# Altium PCB FPC_Tran.PcbDoc
Units mm, origin at the board's own origin, x right, y up, seen from the top; angles counter-clockwise.
Board outline 48.28 x 35.4 mm, 2 copper layers (Top Layer, Bottom Layer); 3 components, 35 nets, 150 pads, 91 vias.
Unrouted connection lines stored in the file: 2.
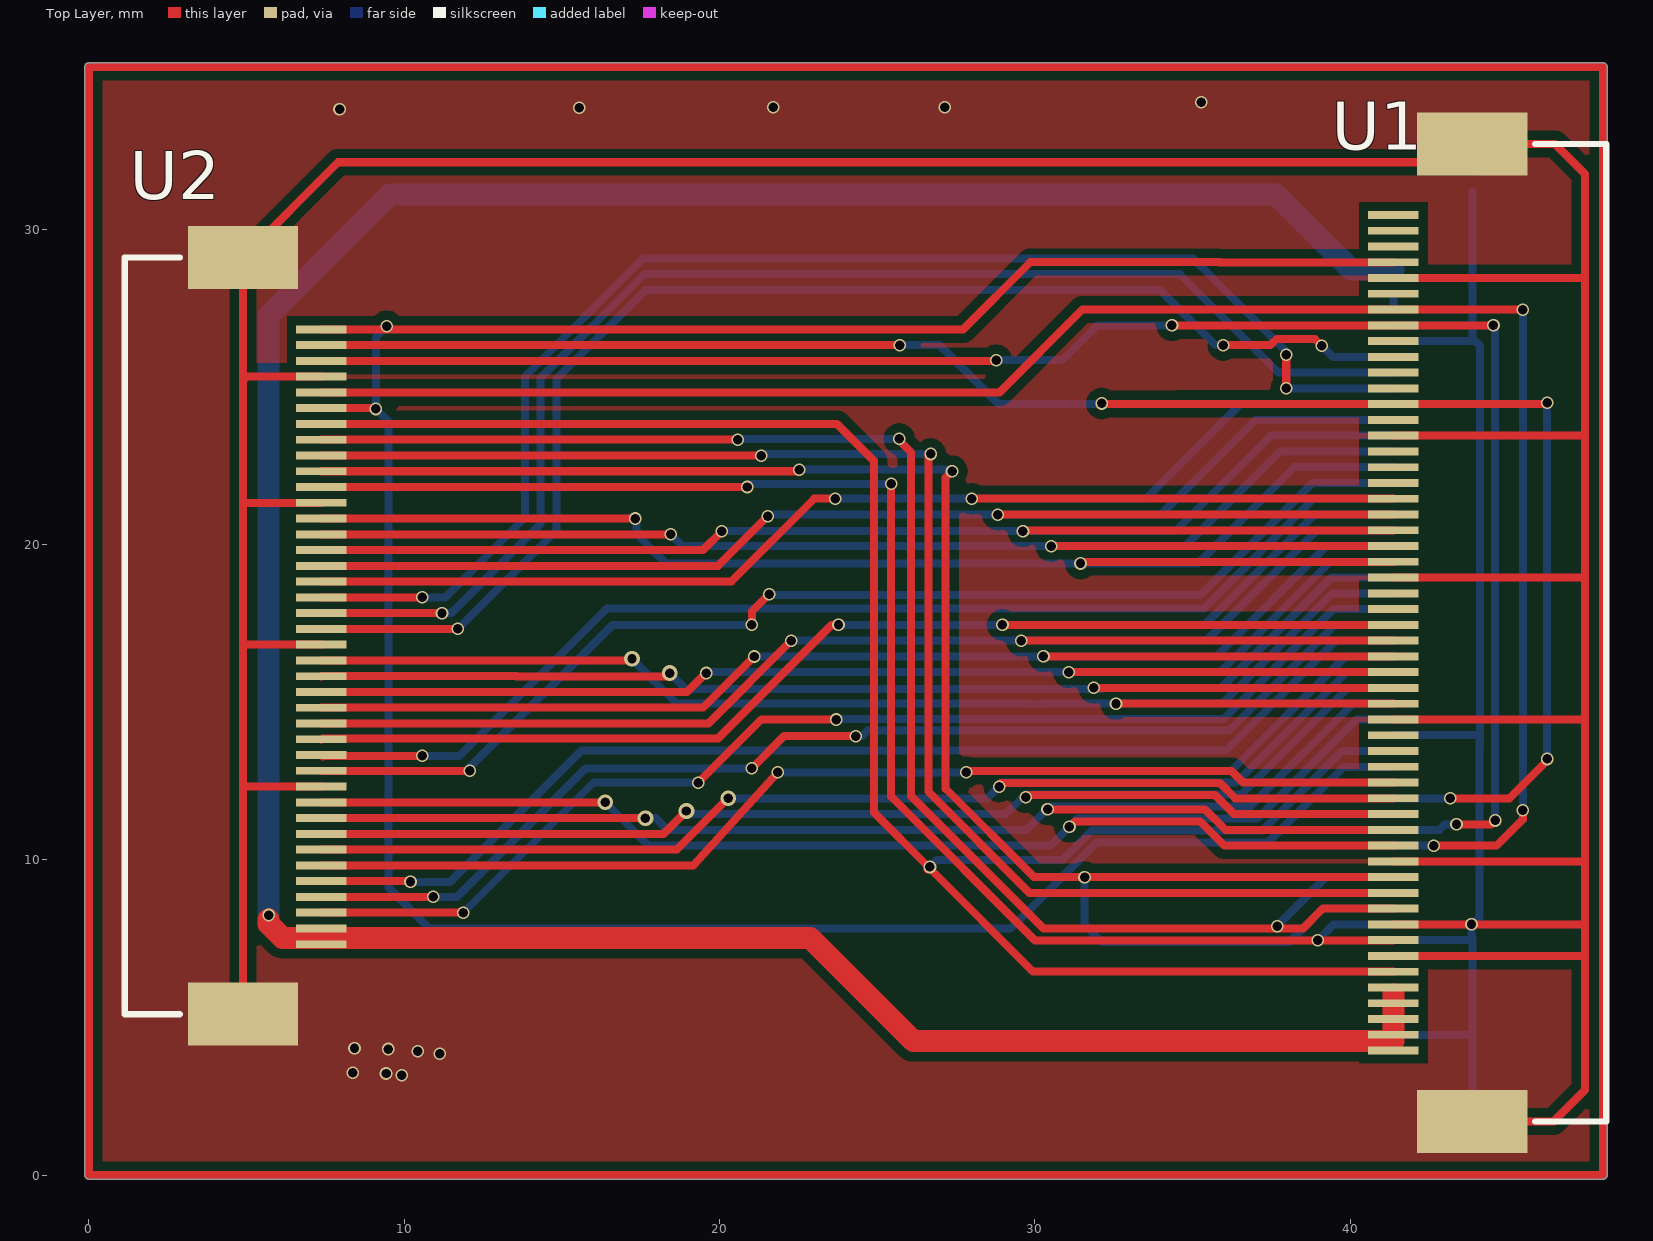
[diagram p0: Top Layer view]
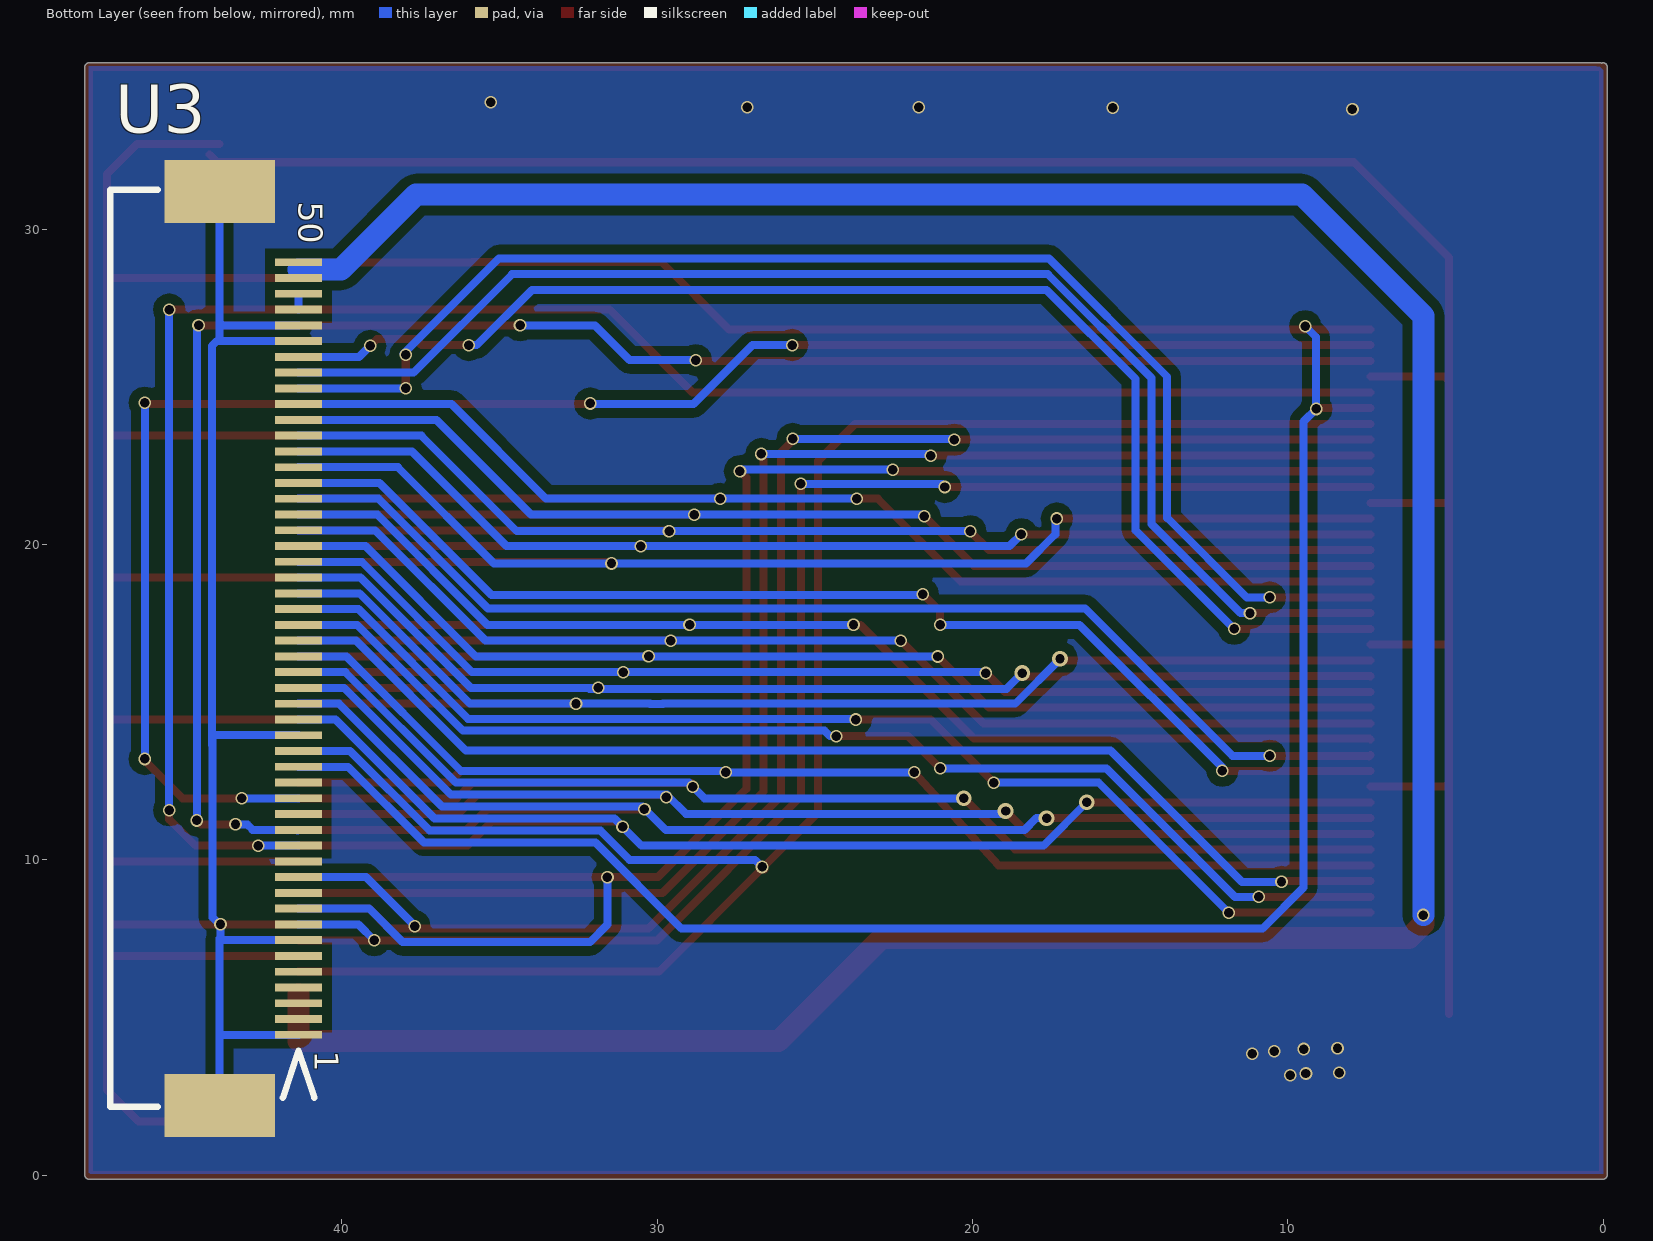
[diagram p1: Bottom Layer view, seen from below]

## Layer stack, top to bottom
Top Solder: solder mask 0.0102, Solder Resist, Dk 3.5
Top Layer: signal copper 0.0356
Dielectric 1: dielectric 0.32, FR-4, Dk 4.8
Bottom Layer: signal copper 0.0356
Bottom Solder: solder mask 0.0102, Solder Resist, Dk 3.5

## Board outline
-0.127,0 ccw(c0,0) 0,-0.127 48.025,-0.127 ccw(c48.025,0) 48.152,0 48.152,35.15 ccw(c48.025,35.15) 48.025,35.277 0.1,35.277 ccw(c0.1,35.15) 0.05,35.267 ccw(c0,35.15) -0.127,35.15

## Design rules (kind name [scope] priority, off if disabled: settings)
Clearance Clearance_Polygons [InPolygon] p1: gap=0.3 ignorepadtopadclearanceinfootprint=FALSE
Clearance "Innerlayer Track Via Clearance" [IsTrack and OnMid vs IsVia] p2: gap=0.127 ignorepadtopadclearanceinfootprint=FALSE
Clearance "Via-Via Clearance" [IsVia vs IsVia] p3: gap=0.3 ignorepadtopadclearanceinfootprint=FALSE
Clearance "Pad-Pad Clearance" [IsPad vs IsPad] p4: gap=0.25 ignorepadtopadclearanceinfootprint=TRUE
Clearance "via-pad Clearance" [IsVia vs IsPad] p5: gap=0.15 ignorepadtopadclearanceinfootprint=FALSE
Clearance "General Clearance" [All] p6: gap=0.125 ignorepadtopadclearanceinfootprint=FALSE
PlaneConnect [All] p1: planeconnectstyle=Direct reliefexpansion=0.508 reliefentries=4 reliefconductorwidth=0.254 reliefairgap=0.254
PolygonConnect [All] p1: connectstyle=Direct reliefconductorwidth=0.254 reliefentries=4 polygonreliefangle="90 Angle" airgapwidth=0.254
RoutingVias [All] p1: holewidth=0.3 width=0.4 viastyle="Through Hole" minholewidth=0.2 minwidth=0.3 maxholewidth=0.711 maxwidth=1.27
SolderMaskExpansion [All] p1: expansion=0.102
Width Width_Power [(InNet('3.3V') AND InNet('5V') AND InNet('+5') AND InNet('GND'))] p1: maxlimit=1 minlimit=0.2 preferedwidth=0.4
Width [All] p2: maxlimit=1 minlimit=0.1 preferedwidth=0.2
29 further rules are at their usual default settings.

## Classes and differential pairs
component class FPC_Tran: U2

## Components (designator, comment, footprint, x,y, rotation, side; value= is the part's Value field where it differs from the comment)
U1 "FL_LCD_FPC_54P" FPC_0.5MM_54P 41.375,16.953 r270 top
U2 "YZ_LCD_FPC_40P" FPC_0.5mm_40P 7.386,17.105 r90 top
U3 "MY_LCD_FPC_50P" FPC_0.5MM_50P 41.375,4.453 r90 bottom

## Footprints (in the part's own frame and the unit in brackets; to place one, negate y for a bottom-side part, rotate by r counter-clockwise, add the part's x,y. Pads: shape width x height; smd on the part's side, far side on the other; paste and mask are expansions set on the pad)
FPC_0.5mm_40P [mm] "FPC_0.5mm_40P"
  rect 0.25x1.6 smd: 1(-9.78,0.011) 2(-9.28,0.011) 3(-8.78,0.011) 4(-8.28,0.011) 5(-7.78,0.011) 6(-7.28,0.011) 7(-6.78,0.011) 8(-6.28,0.011) 9(-5.78,0.011) 10(-5.28,0.011) 11(-4.78,0.011) 12(-4.28,0.011) 13(-3.78,0.011) 14(-3.28,0.011) 15(-2.78,0.011) 16(-2.28,0.011) 17(-1.78,0.011) 18(-1.28,0.011) 19(-0.78,0.011) 20(-0.28,0.011) 21(0.22,0.011) 22(0.72,0.011) 23(1.22,0.011) 24(1.72,0.011) 25(2.22,0.011) 26(2.72,0.011) 27(3.22,0.011) 28(3.72,0.011) 29(4.22,0.011) 30(4.72,0.011) 31(5.22,0.011) 32(5.72,0.011) 33(6.22,0.011) 34(6.72,0.011) 35(7.22,0.011) 36(7.72,0.011) 37(8.22,0.011) 38(8.72,0.011) 39(9.22,0.011) 40(9.72,0.011)
  rect 2x3.5 smd: A(-12,2.5) B(12,2.5)
  silkscreen extent -12,4.5 12,6.25
FPC_0.5MM_50P [mm]
  rect 0.25x1.5 smd: 1(0,0) 2(0.5,0) 3(1,0) 4(1.5,0) 5(2,0) 6(2.5,0) 7(3,0) 8(3.5,0) 9(4,0) 10(4.5,0) 11(5,0) 12(5.5,0) 13(6,0) 14(6.5,0) 15(7,0) 16(7.5,0) 17(8,0) 18(8.5,0) 19(9,0) 20(9.5,0) 21(10,0) 22(10.5,0) 23(11,0) 24(11.5,0) 25(12,0) 26(12.5,0) 27(13,0) 28(13.5,0) 29(14,0) 30(14.5,0) 31(15,0) 32(15.5,0) 33(16,0) 34(16.5,0) 35(17,0) 36(17.5,0) 37(18,0) 38(18.5,0) 39(19,0) 40(19.5,0) 41(20,0) 42(20.5,0) 43(21,0) 44(21.5,0) 45(22,0) 46(22.5,0) 47(23,0) 48(23.5,0) 49(24,0) 50(24.5,0)
  rect 2x3.5 smd: A(-2.25,2.5) B(26.75,2.5)
  silkscreen extent -2.29,-0.5 26.8,5.97
FPC_0.5MM_54P [mm]
  rect 0.25x1.6 smd: 1(-13.5,0) 2(-13,0) 3(-12.5,0) 4(-12,0) 5(-11.5,0) 6(-11,0) 7(-10.5,0) 8(-10,0) 9(-9.5,0) 10(-9,0) 11(-8.5,0) 12(-8,0) 13(-7.5,0) 14(-7,0) 15(-6.5,0) 16(-6,0) 17(-5.5,0) 18(-5,0) 19(-4.5,0) 20(-4,0) 21(-3.5,0) 22(-3,0) 23(-2.5,0) 24(-2,0) 25(-1.5,0) 26(-1,0) 27(-0.5,0) 28(0,0) 29(0.5,0) 30(1,0) 31(1.5,0) 32(2,0) 33(2.5,0) 34(3,0) 35(3.5,0) 36(4,0) 37(4.5,0) 38(5,0) 39(5.5,0) 40(6,0) 41(6.5,0) 42(7,0) 43(7.5,0) 44(8,0) 45(8.5,0) 46(9,0) 47(9.5,0) 48(10,0) 49(10.5,0) 50(11,0) 51(11.5,0) 52(12,0) 53(12.5,0) 54(13,0)
  rect 2x3.5 smd: A(-15.75,2.5) B(15.25,2.5)
  silkscreen extent -15.75,4.5 15.25,6.75

## Via types
v1: diameter 0.4, hole 0.3, Top Layer to Bottom Layer, 85 vias
v2: diameter 0.5, hole 0.3, Top Layer to Bottom Layer, 6 vias

## Nets (pads, with @x,y where several pads share a name; then routed paths per layer and width w, separated by ;. In a path a pad name is that pad's centre, name@x,y a point inside that pad or via, vN(x,y) a via of type N, cw(c..) or ccw(c..) an arc to the next point about the centre after c; other vN are vias at no path point)
+5: U1.50 U1.51 U1.52 U1.53 U1.54 U2.1 U2.2 U3.49 U3.50 | length 96.3
  Top Layer w0.7: v1@5.7,8.1 5.7,7.975 6.15,7.525 22.875,7.525 26.15,4.25 41.375,4.25 U1.53 U1.52 U1.51 41.375,5.725
  Bottom Layer w0.254: U3.49 41.375,28.725
  Bottom Layer w0.7: v1(5.7,8.25) 5.7,27.25 9.55,31.1 37.65,31.1 40.025,28.725 41.375,28.725
CT_INT: U1.13 U2.39 U3.16 | length 56.4
  Top Layer w0.254: U2.39 7.377,26.327 v1(25.723,26.327) v1@25.725,26.325 ; v1(32.125,24.475) 32.147,24.453 34.45,24.453 U1.13 46.203,24.453 v1(46.25,24.5) ; v1(43.175,11.953) 45.053,11.953 46.25,13.15 v1(46.25,13.2)
  Bottom Layer w0.254: v1(25.723,26.327) 26.973,26.327 28.847,24.453 32.103,24.453 v1(32.125,24.475) ; U3.16 v1(43.175,11.953) v1@43.178,11.953 ; v1(46.25,13.2) v1(46.25,24.5)
CT_RST: U1.4 U2.35 U2.40 U3.18 | length 89.3
  Top Layer w0.254: U2.35 9.075,24.325 v1(9.1,24.3) ; U2.40 27.725,26.825 29.856,28.956 35.872,28.956 35.875,28.953 U1.4
  Bottom Layer w0.254: v1(9.45,26.925) 9.1,26.575 v1(9.1,24.3) 9.5,23.9 9.5,9.121 10.796,7.825 29.236,7.825 31.961,10.55 37.4,10.55 39.803,12.953 U3.18
CT_SCL: U1.8 U2.38 U3.14 | length 56.8
  Top Layer w0.254: U2.38 28.75,25.825 v1(28.775,25.85) ; v1@34.35,26.953 U1.8 v1(44.547,26.953) ; v1(43.375,11.125) 44.475,11.125 v1(44.6,11.25)
  Bottom Layer w0.254: v1(28.775,25.85) 30.875,25.85 31.975,26.95 v1(34.35,26.95) ; U3.14@41.403,10.925 U3.14 42.828,10.953 43,11.125 v1(43.375,11.125) v1@43.326,11.076 ; v1(44.547,26.953) 44.6,26.9 v1(44.6,11.25)
CT_SDA: U1.7 U2.36 U3.13 | length 59.8
  Top Layer w0.254: U2.36 28.878,24.825 31.506,27.453 U1.7 v1(45.478,27.453) ; v1(42.647,10.453) 44.649,10.453 45.478,11.282 v1(45.478,11.575)
  Bottom Layer w0.254: U3.13 v1(42.647,10.453) v1@42.63,10.436 ; v1(45.478,11.575) v1(45.478,27.453)
GND: U1.5 U1.15 U1.24 U1.33 U1.42 U1.46 U1.48 U1.A U1.B U2.11 U2.20 U2.29 U2.37 U2.A U2.B U3.1 U3.7 U3.12 U3.20 U3.45 U3.46 U3.A U3.B | length 196.7
  Top Layer w0.254: U2.A 4.886,12.425 ; U2.11 4.986,12.325 4.886,12.425 ; U2.20 4.961,16.825 4.886,16.9 ; U2.29 4.886,21.325 ; U2.37 5.011,25.325 4.886,25.2 ; U1.48 47.378,6.953 47.45,7.025 ; U1.46 v1(43.85,7.953) 47.447,7.953 47.45,7.95 ; U1.42 47.45,9.953 ; U1.33 47.447,14.453 47.45,14.45 ; U1.24 47.403,18.953 47.45,19 ; U1.15 47.372,23.453 47.45,23.375 ; U1.5 47.397,28.453 47.45,28.4 ; U1.B 46.447,1.703 47.45,2.706 47.45,7.025 ; U1.A 46.497,32.703 47.45,31.75 47.45,28.4 ; U1.A@44.201,32.376 43.95,32.125 7.906,32.125 U2.B 4.886,25.2 ; 4.886,12.425 4.886,16.9 ; 4.886,16.9 4.886,21.325 ; 4.886,21.325 4.886,25.2 ; 47.45,7.025 47.45,7.95 ; 47.45,7.95 47.45,9.953 ; 47.45,9.953 47.45,14.45 ; 47.45,14.45 47.45,19 ; 47.45,19 47.45,23.375 ; 47.45,23.375 47.45,28.4
  Bottom Layer w0.254: U3.1 43.872,4.453 43.875,4.45 ; U3.7 43.828,7.453 43.85,7.475 ; U3.20 44.1,13.953 44.1,13.675 ; U3.45 43.967,26.453 44.125,26.295 44.125,13.65 44.1,13.675 ; U3.46 43.778,26.953 43.875,27.05 ; v1(43.85,7.953) 43.85,7.475 ; U3.A 43.875,4.45 ; v1@43.875,7.953 44.1,8.178 44.1,13.675 ; 43.875,26.5 43.875,27.05 ; U3.B 43.875,27.05 ; 43.85,7.475 43.875,7.5 43.875,4.45
  other v1: 9.921,3.175 9.425,3.225 8.375,3.25 11.125,3.85 10.425,3.925 9.5,4 8.425,4.025 7.95,33.8 15.55,33.85 21.7,33.875 27.14,33.875 35.275,34.025
LCD_B0: U2.21 U3.44 | length 42.3
  Top Layer w0.254: U2.21 v1(11.7,17.325) ; v1(35.975,26.325) 37.475,26.325 37.675,26.525 38.881,26.525 v1(39.106,26.3)
  Bottom Layer w0.254: v1(11.7,17.325) 14.825,20.45 14.825,25.25 17.65,28.075 33.975,28.075 35.725,26.325 v1(35.975,26.325) ; v1(39.106,26.3) 39.453,25.953 U3.44
LCD_B1: U2.22 U3.43 | length 42.5
  Top Layer w0.254: U2.22 v1(11.2,17.825)
  Bottom Layer w0.254: v1(11.2,17.825) 11.5,17.825 14.325,20.65 14.325,25.286 17.614,28.575 34.6,28.575 37.722,25.453 U3.43
LCD_B2: U2.23 U3.42 | length 43.6
  Top Layer w0.254: U2.23 v1(10.575,18.325) ; v1(37.975,24.956) v1(37.975,26.022) v1@37.997,26
  Bottom Layer w0.254: v1(10.575,18.325) 11.3,18.325 13.825,20.85 13.825,25.322 17.578,29.075 35.025,29.075 38.048,26.052 38.019,26.022 v1(37.975,26.022) ; v1(37.975,24.956) 37.972,24.953 U3.42
LCD_B3: U1.19 U2.24 U3.41 | length 49.7
  Top Layer w0.254: U2.24 7.377,18.827 11.537,18.827 11.539,18.825 20.375,18.825 23.003,21.453 v1(23.675,21.453) ; v1@28,21.45 v1(28.003,21.453) U1.19
  Bottom Layer w0.254: v1(23.675,21.453) v1(28.003,21.453) 33.528,21.453 36.528,24.453 U3.41
LCD_B4: U1.20 U2.25 U3.40 | length 48.4
  Top Layer w0.254: U2.25 19.95,19.325 v1(21.525,20.9) ; v1(28.825,20.95) 28.828,20.953 U1.20
  Bottom Layer w0.254: v1@21.525,20.95 v1(28.825,20.95) 34,20.95 37.003,23.953 U3.40
LCD_B5: U1.21 U2.26 U3.39 | length 47.3
  Top Layer w0.254: U2.26 19.475,19.825 v1(20.075,20.425) v1@20.1,20.425 ; v1(29.625,20.425) 29.653,20.453 U1.21
  Bottom Layer w0.254: v1(20.075,20.425) v1(29.625,20.425) 34.453,20.425 37.481,23.453 U3.39
LCD_B6: U1.22 U2.27 U3.38 | length 46.3
  Top Layer w0.254: U2.27 11.375,20.325 11.377,20.323 12.583,20.323 12.585,20.325 17.136,20.325 17.138,20.323 18.448,20.323 v1(18.45,20.325) ; v1(30.525,19.95) 30.528,19.953 U1.22
  Bottom Layer w0.254: v1(18.45,20.325) 18.825,19.95 v1(30.525,19.95) 34.775,19.95 37.778,22.953 U3.38
LCD_B7: U1.23 U2.28 U3.37 | length 45.9
  Top Layer w0.254: U2.28 v1(17.325,20.825) ; v1@31.55,19.453 U1.23
  Bottom Layer w0.254: v1@17.375,20.825 17.375,20.325 18.3,19.4 v1(31.45,19.4) 35.175,19.4 38.228,22.453 U3.37
LCD_CLK: U1.47 U2.30 U3.8 | length 48.5
  Top Layer w0.254: U2.30 v1(20.875,21.825) ; v1(25.447,21.925) 25.447,12.009 30.01,7.446 41.368,7.446 U1.47
  Bottom Layer w0.254: v1(20.875,21.825) 20.975,21.925 v1(25.447,21.925) ; v1(38.975,7.45) 39.478,7.953 U3.8
LCD_DE: U1.45 U2.33 U3.11 | length 51.4
  Top Layer w0.254: U2.33 v1(20.575,23.325) ; v1@25.675,23.325 26.075,22.925 26.075,12.025 30.275,7.825 38.506,7.825 39.134,8.453 U1.45
  Bottom Layer w0.254: v1(20.575,23.325) 20.6,23.35 v1(25.7,23.35) ; v1(37.686,7.9) 39.239,9.453 U3.11
LCD_G0: U2.12 U3.36 | length 38.1
  Top Layer w0.254: U2.12 7.377,12.823 12.073,12.823 v1(12.075,12.825) ; v1(21.025,17.453) 21.025,17.875 v1(21.575,18.425)
  Bottom Layer w0.254: v1(12.075,12.825) 12.075,12.925 16.603,17.453 v1(21.025,17.453) ; v1@21.575,18.4 35.253,18.4 38.806,21.953 U3.36
LCD_G1: U2.13 U3.35 | length 37.4
  Top Layer w0.254: U2.13 U2.13@7.425,13.275 ; U2.13@7.45,13.3 v1(10.575,13.3)
  Bottom Layer w0.254: v1(10.575,13.3) 11.75,13.3 16.425,17.975 21.386,17.975 21.388,17.973 35.362,17.973 38.842,21.453 U3.35
LCD_G2: U1.27 U2.14 U3.34 | length 49.4
  Top Layer w0.254: U2.14 7.402,13.852 19.949,13.852 23.55,17.453 v1(23.775,17.453) ; v1(28.975,17.453) U1.27
  Bottom Layer w0.254: v1(23.775,17.453) v1(28.975,17.453) 35.378,17.453 38.878,20.953 U3.34
LCD_G3: U1.28 U2.15 U3.33 | length 48.3
  Top Layer w0.254: U2.15 19.647,14.325 v1(22.275,16.953) ; v1(29.575,16.953) U1.28
  Bottom Layer w0.254: v1@22.275,16.953 v1(29.575,16.953) 35.45,16.953 38.95,20.453 U3.33
LCD_G4: U1.29 U2.16 U3.32 | length 47.2
  Top Layer w0.254: U2.16 19.475,14.825 v1(21.1,16.45) v1@21.103,16.453 ; v1(30.275,16.453) U1.29
  Bottom Layer w0.254: v1(21.1,16.45) 30.272,16.45 v1(30.275,16.453) 35.753,16.453 39.253,19.953 U3.32
LCD_G5: U1.30 U2.17 U3.31 | length 46
  Top Layer w0.254: U2.17 7.379,15.321 18.971,15.321 v1(19.575,15.925) ; v1@31.075,15.955 31.077,15.953 U1.30
  Bottom Layer w0.254: v1(19.575,15.925) 19.603,15.953 v1(31.075,15.953) 35.87,15.953 39.37,19.453 U3.31
LCD_G6: U1.31 U2.18 U3.30 | length 45.5
  Top Layer w0.254: U2.18 7.377,15.823 7.379,15.825 13.565,15.825 13.567,15.823 18.323,15.823 v2(18.425,15.925) ; v1(31.875,15.455) 41.373,15.455 U1.31
  Bottom Layer w0.254: v2(18.425,15.925) 18.925,15.425 32.148,15.425 ; v1(31.875,15.455) 35.908,15.455 39.406,18.953 U3.30
LCD_G7: U1.32 U2.19 U3.29 | length 44.9
  Top Layer w0.254: U2.19 17.175,16.325 v2(17.225,16.375) ; v1(32.575,14.953) U1.32
  Bottom Layer w0.254: v2(17.225,16.375) 18.647,14.953 29.816,14.953 29.818,14.951 30.234,14.951 30.236,14.953 v1(32.575,14.953) 35.942,14.953 39.442,18.453 U3.29
LCD_HSYNC: U1.43 U2.31 U3.9 | length 57.5
  Top Layer w0.254: U2.31 22.475,22.325 v1(22.527,22.377) ; v1(27.375,22.325) 27.175,22.125 27.175,12.253 29.975,9.453 v1(31.578,9.453) 31.822,9.453 ; 31.825,9.45 31.822,9.453 ; U1.43 31.822,9.453
  Bottom Layer w0.254: v1(22.527,22.377) v1@27.323,22.377 ; v1(31.578,9.453) 31.578,7.947 32.125,7.4 38.081,7.4 39.134,8.453 U3.9
LCD_PWM: U1.49 U2.34 U3.19 | length 64.1
  Top Layer w0.254: U2.34 23.725,23.825 24.896,22.654 24.896,11.504 v1@26.65,9.75 ; v1@26.6,9.7 v1@26.65,9.75 ; v1(26.675,9.775) v1@26.65,9.75 ; U1.49 29.947,6.453 v1@26.65,9.75
  Bottom Layer w0.254: v1(26.675,9.775) 26.901,10.001 30.876,10.001 31.805,10.93 37.216,10.93 39.739,13.453 U3.19
LCD_R0: U2.3 U3.28 | length 38
  Top Layer w0.254: U2.3 v1(11.875,8.325) ; v1(19.323,12.448) 21.325,14.45 v1(23.7,14.45)
  Bottom Layer w0.254: v1(11.875,8.325) 15.998,12.448 v1(19.323,12.448) ; v1(23.7,14.45) 23.725,14.475 36,14.475 39.478,17.953 U3.28
LCD_R1: U2.4 U3.27 | length 37.7
  Top Layer w0.254: U2.4 v1(10.925,8.825) ; v1(21.025,12.9) 22.05,13.925 v1(24.325,13.925)
  Bottom Layer w0.254: v1(10.925,8.825) 11.675,8.825 15.75,12.9 v1(21.025,12.9) ; v1(24.325,13.925) 24.525,13.925 24.696,14.096 36.157,14.096 39.514,17.453 U3.27 U3.27@41.477,17.453
LCD_R2: U2.5 U3.26 | length 37.2
  Top Layer w0.254: U2.5 10.175,9.325 v1(10.2,9.3)
  Bottom Layer w0.254: v1(10.2,9.3) 11.45,9.3 15.623,13.473 36.07,13.473 39.55,16.953 U3.26
LCD_R3: U1.37 U2.6 U3.25 | length 50.5
  Top Layer w0.254: U2.6 19.175,9.825 v1(21.853,12.778) ; v1(27.825,12.778) 27.861,12.814 36.239,12.814 36.6,12.453 U1.37
  Bottom Layer w0.254: v1(21.853,12.778) v1(27.825,12.778) 27.872,12.825 36.228,12.825 39.856,16.453 U3.25
LCD_R4: U1.38 U2.7 U3.24 | length 49
  Top Layer w0.254: U2.7 18.647,10.325 v2(20.275,11.953) ; v1@28.875,12.399 28.911,12.435 35.873,12.435 36.355,11.953 U1.38
  Bottom Layer w0.254: v2(20.275,11.953) 28.503,11.953 28.996,12.446 36.385,12.446 39.892,15.953 U3.24
  other v1: 28.875,12.325
LCD_R5: U1.39 U2.8 U3.23 | length 47.9
  Top Layer w0.254: U2.8 14.865,10.825 14.869,10.821 18.221,10.821 v2(18.95,11.55) ; v1@29.695,12.02 29.728,12.053 35.719,12.053 36.319,11.453 U1.39
  Bottom Layer w0.254: v2@18.95,11.451 29.079,11.451 29.081,11.453 29.695,12.067 36.542,12.067 39.928,15.453 U3.23
  other v1: 29.711,11.983
LCD_R6: U1.40 U2.9 U3.22 | length 47
  Top Layer w0.254: U2.9 11.675,11.325 11.677,11.323 12.108,11.323 12.11,11.325 15.025,11.325 ; 15.077,11.323 v2(17.65,11.323) ; v1(30.404,11.601) 35.399,11.601 36.047,10.953 U1.40
  Bottom Layer w0.254: v2(17.65,11.323) 17.977,11.323 18.349,10.951 29.729,10.951 30.379,11.601 v1(30.404,11.601) 30.404,11.626 30.466,11.688 36.827,11.688 40.092,14.953 U3.22
LCD_R7: U1.41 U2.10 U3.21 | length 46.9
  Top Layer w0.254: U2.10 v2(16.375,11.825) ; v1(31.1,11.05) 31.272,11.222 35.242,11.222 36.011,10.453 U1.41
  Bottom Layer w0.254: v2(16.375,11.825) 17.751,10.449 30.499,10.449 v1(31.1,11.05) 31.359,11.309 37.059,11.309 40.203,14.453 U3.21
LCD_VSYNC: U1.44 U2.32 U3.10 | length 46.1
  Top Layer w0.254: U2.32 v1@21.323,22.825 ; v1@26.623,22.801 26.623,12.167 29.837,8.953 U1.44
  Bottom Layer w0.254: v1(21.323,22.821) 21.375,22.873 v1(26.695,22.873)
pads on no net: U1.1 U1.2 U1.3 U1.6 U1.9 U1.10 U1.11 U1.12 U1.14 U1.16 U1.17 U1.18 U1.25 U1.26 U1.34 U1.35 U1.36 U3.2 U3.3 U3.4 U3.5 U3.6 U3.15 U3.17 U3.47 U3.48
copper on no net: | length 169.6
  Top Layer w0.254: 0.1,35.15 48.025,35.15 48.025,0 2.85,0 0,0 0,35.15 2.85,35.15
  Bottom Layer w0.254: 41.375,27.453 41.375,27.953

## Polygon pours and split planes (outlines as drawn)
GND on Bottom Layer "Bottom Layer-GND" (solid, remove dead copper, pour order 8): 0.1,35.15 0,35.05 0,0.05 47.975,0.05 48.025,0 48.025,35.175 0.025,35.175 0,35.15
GND on Top Layer "Top Layer-GND" (solid, remove dead copper, pour order 12): 0,35.15 0,0 48.025,0 48.025,35.15 0,35.15
GND on Top Layer "Top Layer-GND 1" (solid, remove dead copper, pour order 10): 0,35.05

## Text inside footprints (layer, text, board x,y; h text height)
U3: Bottom Overlay "1" at 40.867,3.945 h0.76 r90; Bottom Overlay "50" at 41.375,30.869 h0.76 r90